# Altium PCB Quectel_SA800U-WF_PCB_Footprint_AD_V1.1.PcbDoc
Units mil, origin at the board's own origin, x right, y up, seen from the top; angles counter-clockwise.
Board outline 1456.69 x 2362.2 mil, 6 copper layers (TOP, lay2_SIGNAL, lay3_POWER, Inner Layer 4, Inner Layer 5, BOTTOM), stack 58.1 mil thick; 2 components, 0 nets, 344 pads, 0 vias.
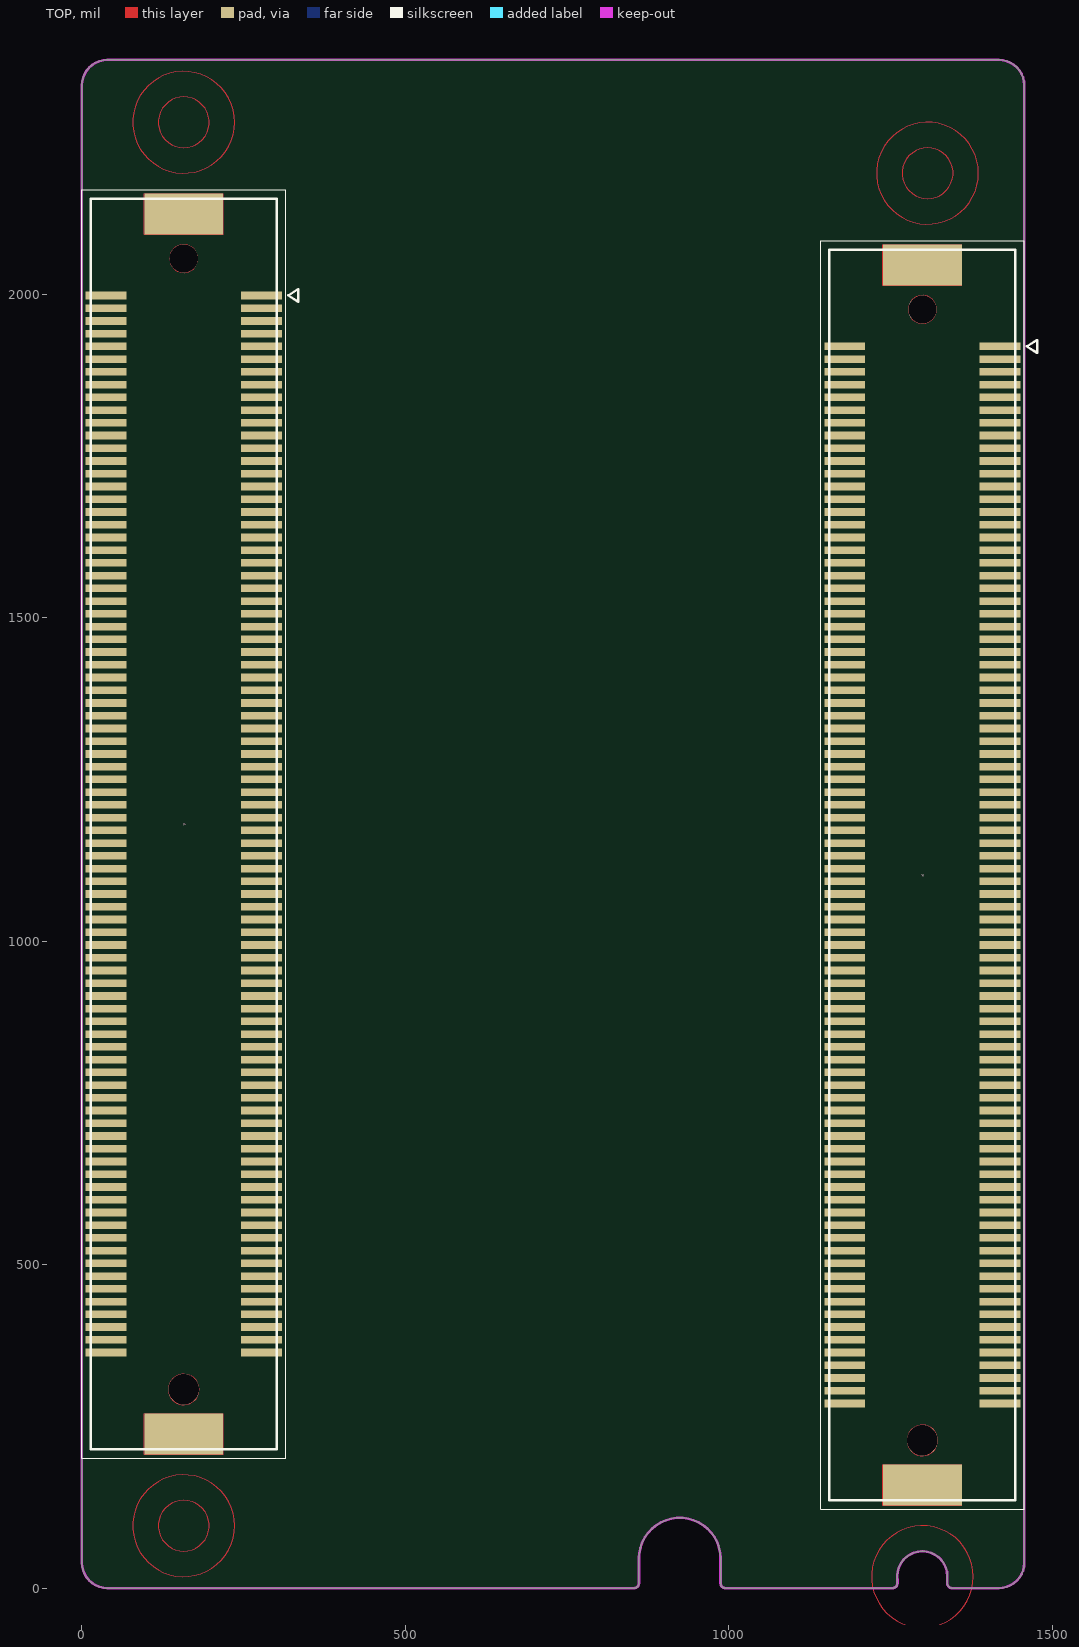
[diagram p0: TOP view]
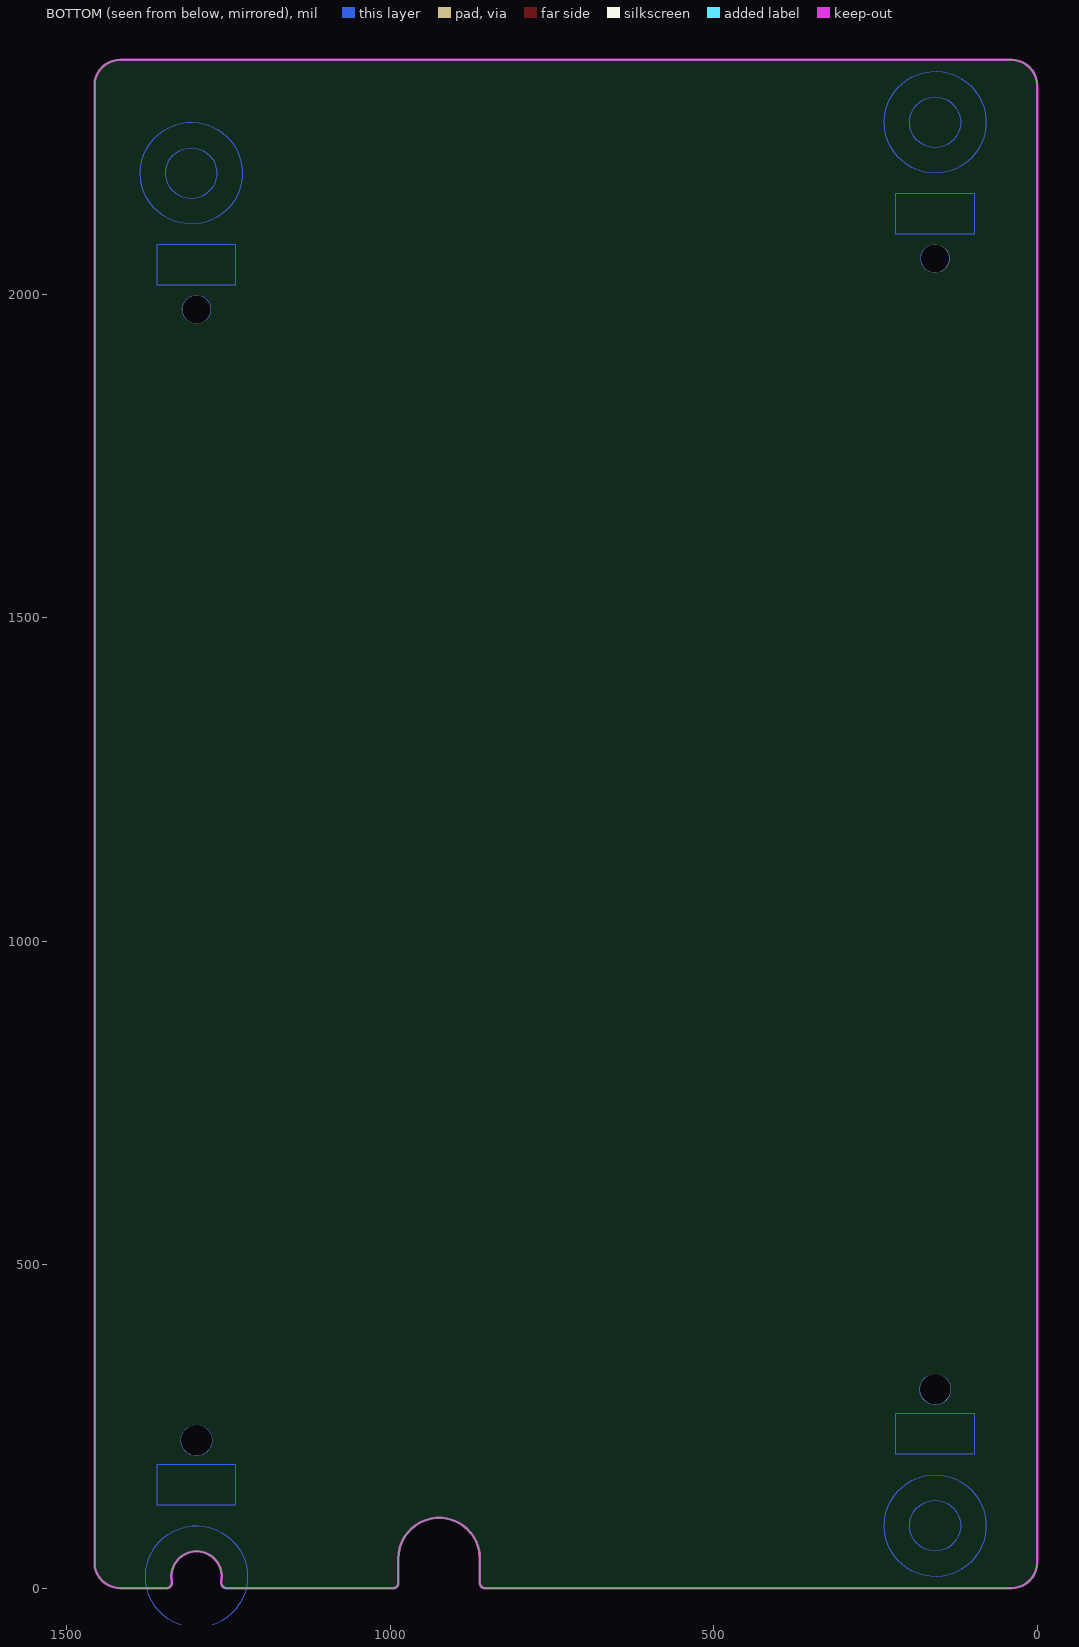
[diagram p1: BOTTOM view, seen from below]

## Layer stack, top to bottom
Solder Mask Top: solder mask 0.4, Solder Resist, Dk 3.5
TOP: signal copper 1.35
Dielectric1: dielectric 10, FR-4, Dk 4.3
lay2_SIGNAL: signal copper 1.35
Dielectric2: dielectric 10, FR-4, Dk 4.3
lay3_POWER: signal copper 1.35
Dielectric3: dielectric 10, FR-4, Dk 4.3
Inner Layer 4: signal copper 1.35
Dielectric4: dielectric 10, FR-4, Dk 4.3
Inner Layer 5: signal copper 1.35
Dielectric5: dielectric 10, FR-4, Dk 4.3
BOTTOM: signal copper 1.35
Solder Mask Bottom: solder mask 0.4, Solder Resist, Dk 3.5

## Board outline
0,39.37 ccw(c39.37,39.37) 39.37,0 853.27,0 853.26,0 ccw(c853.46,7.68) 861.14,7.87 861.14,45.78 861.14,45.79 cw(c924.13,45.68) 987.13,45.78 987.13,7.87 987.13,7.88 ccw(c994.8,7.68) 995,0 1252.81,0 ccw(c1252.81,7.87) 1260.69,7.87 1260.69,11.85 1260.69,11.84 cw(c1299.05,17.99) 1337.42,11.85 1337.42,7.87 ccw(c1345.29,7.87) 1345.29,0 1417.32,0 ccw(c1417.32,39.37) 1456.69,39.37 1456.69,2322.83 ccw(c1417.32,2322.83) 1417.32,2362.2 39.37,2362.2 ccw(c39.37,2322.83) 0,2322.83

## Design rules (kind name [scope] priority, off if disabled: settings)
Clearance [All] p1: gap=10 ignorepadtopadclearanceinfootprint=FALSE except(0: Arc-Hole Track-Hole SMDPad-Hole THPad-Hole Via-Hole Fill-Hole Poly-Hole Region-Hole Text-Hole)
PlaneConnect "Power Plane Connect Style - pads with no thermal" [(Name='J1-171') Or (Name='J1-172') Or (Name='J2-171') Or (Name='J2-172')] p1: planeconnectstyle=NoConnect reliefexpansion=20 reliefentries=4 reliefconductorwidth=10 reliefairgap=10 // PAD - No Thermal Connect Rule
PlaneConnect [All] p2: planeconnectstyle=Relief reliefexpansion=20 reliefentries=4 reliefconductorwidth=10 reliefairgap=10
PolygonConnect [All] p1: connectstyle=Relief reliefconductorwidth=10 reliefentries=4 polygonreliefangle="90 Angle" airgapwidth=10
RoutingVias [All] p1: holewidth=28 width=50 viastyle="Through Hole" minholewidth=28 minwidth=50 maxholewidth=28 maxwidth=50
SolderMaskExpansion [All] p1: expansion=4
Width [All] p1: maxlimit=10 minlimit=10 preferedwidth=10
29 further rules are at their usual default settings.

## Components (designator, comment, footprint, x,y, rotation, side; value= is the part's Value field where it differs from the comment)
J1 "FX10A-168S-SV_21" FX10A-168S-SV_21 157.48,1181.1 r270 top
J2 "FX10A-168S-SV_21" FX10A-168S-SV_21 1299.21,1102.36 r270 top

## Footprints (in the part's own frame and the unit in brackets; to place one, negate y for a bottom-side part, rotate by r counter-clockwise, add the part's x,y. Pads: shape width x height; smd on the part's side, far side on the other; paste and mask are expansions set on the pad)
FX10A-168S-SV_21 [mm]
  rect 0.3x1.6 smd mask+0.05: 1(-20.75,3.05) 2(-20.75,-3.05) 3(-20.25,3.05) 4(-20.25,-3.05) 5(-19.75,3.05) 6(-19.75,-3.05) 7(-19.25,3.05) 8(-19.25,-3.05) 9(-18.75,3.05) 10(-18.75,-3.05) 11(-18.25,3.05) 12(-18.25,-3.05) 13(-17.75,3.05) 14(-17.75,-3.05) 15(-17.25,3.05) 16(-17.25,-3.05) 17(-16.75,3.05) 18(-16.75,-3.05) 19(-16.25,3.05) 20(-16.25,-3.05) 21(-15.75,3.05) 22(-15.75,-3.05) 23(-15.25,3.05) 24(-15.25,-3.05) 25(-14.75,3.05) 26(-14.75,-3.05) 27(-14.25,3.05) 28(-14.25,-3.05) 29(-13.75,3.05) 30(-13.75,-3.05) 31(-13.25,3.05) 32(-13.25,-3.05) 33(-12.75,3.05) 34(-12.75,-3.05) 35(-12.25,3.05) 36(-12.25,-3.05) 37(-11.75,3.05) 38(-11.75,-3.05) 39(-11.25,3.05) 40(-11.25,-3.05) 41(-10.75,3.05) 42(-10.75,-3.05) 43(-10.25,3.05) 44(-10.25,-3.05) 45(-9.75,3.05) 46(-9.75,-3.05) 47(-9.25,3.05) 48(-9.25,-3.05) 49(-8.75,3.05) 50(-8.75,-3.05) 51(-8.25,3.05) 52(-8.25,-3.05) 53(-7.75,3.05) 54(-7.75,-3.05) 55(-7.25,3.05) 56(-7.25,-3.05) 57(-6.75,3.05) 58(-6.75,-3.05) 59(-6.25,3.05) 60(-6.25,-3.05) 61(-5.75,3.05) 62(-5.75,-3.05) 63(-5.25,3.05) 64(-5.25,-3.05) 65(-4.75,3.05) 66(-4.75,-3.05) 67(-4.25,3.05) 68(-4.25,-3.05) 69(-3.75,3.05) 70(-3.75,-3.05) 71(-3.25,3.05) 72(-3.25,-3.05) 73(-2.75,3.05) 74(-2.75,-3.05) 75(-2.25,3.05) 76(-2.25,-3.05) 77(-1.75,3.05) 78(-1.75,-3.05) 79(-1.25,3.05) 80(-1.25,-3.05) 81(-0.75,3.05) 82(-0.75,-3.05) 83(-0.25,3.05) 84(-0.25,-3.05) 85(0.25,3.05) 86(0.25,-3.05) 87(0.75,3.05) 88(0.75,-3.05) 89(1.25,3.05) 90(1.25,-3.05) 91(1.75,3.05) 92(1.75,-3.05) 93(2.25,3.05) 94(2.25,-3.05) 95(2.75,3.05) 96(2.75,-3.05) 97(3.25,3.05) 98(3.25,-3.05) 99(3.75,3.05) 100(3.75,-3.05) 101(4.25,3.05) 102(4.25,-3.05) 103(4.75,3.05) 104(4.75,-3.05) 105(5.25,3.05) 106(5.25,-3.05) 107(5.75,3.05) 108(5.75,-3.05) 109(6.25,3.05) 110(6.25,-3.05) 111(6.75,3.05) 112(6.75,-3.05) 113(7.25,3.05) 114(7.25,-3.05) 115(7.75,3.05) 116(7.75,-3.05) 117(8.25,3.05) 118(8.25,-3.05) 119(8.75,3.05) 120(8.75,-3.05) 121(9.25,3.05) 122(9.25,-3.05) 123(9.75,3.05) 124(9.75,-3.05) 125(10.25,3.05) 126(10.25,-3.05) 127(10.75,3.05) 128(10.75,-3.05) 129(11.25,3.05) 130(11.25,-3.05) 131(11.75,3.05) 132(11.75,-3.05) 133(12.25,3.05) 134(12.25,-3.05) 135(12.75,3.05) 136(12.75,-3.05) 137(13.25,3.05) 138(13.25,-3.05) 139(13.75,3.05) 140(13.75,-3.05) 141(14.25,3.05) 142(14.25,-3.05) 143(14.75,3.05) 144(14.75,-3.05) 145(15.25,3.05) 146(15.25,-3.05) 147(15.75,3.05) 148(15.75,-3.05) 149(16.25,3.05) 150(16.25,-3.05) 151(16.75,3.05) 152(16.75,-3.05) 153(17.25,3.05) 154(17.25,-3.05) 155(17.75,3.05) 156(17.75,-3.05) 157(18.25,3.05) 158(18.25,-3.05) 159(18.75,3.05) 160(18.75,-3.05) 161(19.25,3.05) 162(19.25,-3.05) 163(19.75,3.05) 164(19.75,-3.05) 165(20.25,3.05) 166(20.25,-3.05) 167(20.75,3.05) 168(20.75,-3.05)
  rect 1.6x3.1 smd mask+0.05: 169(-23.95,0) 170(23.95,0)
  round 1.1 hole 1.1 unplated mask+0.05: 171(-22.2,0)
  round 1.2 hole 1.2 unplated mask+0.05: 172(22.2,0)
  silkscreen extent -24.9,-4 24.9,4.5

## Nets (pads, with @x,y where several pads share a name; then routed paths per layer and width w, separated by ;. In a path a pad name is that pad's centre, name@x,y a point inside that pad or via, vN(x,y) a via of type N, cw(c..) or ccw(c..) an arc to the next point about the centre after c; other vN are vias at no path point)
pads on no net: J1.1 J1.2 J1.3 J1.4 J1.5 J1.6 J1.7 J1.8 J1.9 J1.10 J1.11 J1.12 J1.13 J1.14 J1.15 J1.16 J1.17 J1.18 J1.19 J1.20 J1.21 J1.22 J1.23 J1.24 J1.25 J1.26 J1.27 J1.28 J1.29 J1.30 J1.31 J1.32 J1.33 J1.34 J1.35 J1.36 J1.37 J1.38 J1.39 J1.40 J1.41 J1.42 J1.43 J1.44 J1.45 J1.46 J1.47 J1.48 J1.49 J1.50 J1.51 J1.52 J1.53 J1.54 J1.55 J1.56 J1.57 J1.58 J1.59 J1.60 J1.61 J1.62 J1.63 J1.64 J1.65 J1.66 J1.67 J1.68 J1.69 J1.70 J1.71 J1.72 J1.73 J1.74 J1.75 J1.76 J1.77 J1.78 J1.79 J1.80 J1.81 J1.82 J1.83 J1.84 J1.85 J1.86 J1.87 J1.88 J1.89 J1.90 J1.91 J1.92 J1.93 J1.94 J1.95 J1.96 J1.97 J1.98 J1.99 J1.100 J1.101 J1.102 J1.103 J1.104 J1.105 J1.106 J1.107 J1.108 J1.109 J1.110 J1.111 J1.112 J1.113 J1.114 J1.115 J1.116 J1.117 J1.118 J1.119 J1.120 J1.121 J1.122 J1.123 J1.124 J1.125 J1.126 J1.127 J1.128 J1.129 J1.130 J1.131 J1.132 J1.133 J1.134 J1.135 J1.136 J1.137 J1.138 J1.139 J1.140 J1.141 J1.142 J1.143 J1.144 J1.145 J1.146 J1.147 J1.148 J1.149 J1.150 J1.151 J1.152 J1.153 J1.154 J1.155 J1.156 J1.157 J1.158 J1.159 J1.160 J1.161 J1.162 J1.163 J1.164 J1.165 J1.166 J1.167 J1.168 J1.169 J1.170 J1.171 J1.172 J2.1 J2.2 J2.3 J2.4 J2.5 J2.6 J2.7 J2.8 J2.9 J2.10 J2.11 J2.12 J2.13 J2.14 J2.15 J2.16 J2.17 J2.18 J2.19 J2.20 J2.21 J2.22 J2.23 J2.24 J2.25 J2.26 J2.27 J2.28 J2.29 J2.30 J2.31 J2.32 J2.33 J2.34 J2.35 J2.36 J2.37 J2.38 J2.39 J2.40 J2.41 J2.42 J2.43 J2.44 J2.45 J2.46 J2.47 J2.48 J2.49 J2.50 J2.51 J2.52 J2.53 J2.54 J2.55 J2.56 J2.57 J2.58 J2.59 J2.60 J2.61 J2.62 J2.63 J2.64 J2.65 J2.66 J2.67 J2.68 J2.69 J2.70 J2.71 J2.72 J2.73 J2.74 J2.75 J2.76 J2.77 J2.78 J2.79 J2.80 J2.81 J2.82 J2.83 J2.84 J2.85 J2.86 J2.87 J2.88 J2.89 J2.90 J2.91 J2.92 J2.93 J2.94 J2.95 J2.96 J2.97 J2.98 J2.99 J2.100 J2.101 J2.102 J2.103 J2.104 J2.105 J2.106 J2.107 J2.108 J2.109 J2.110 J2.111 J2.112 J2.113 J2.114 J2.115 J2.116 J2.117 J2.118 J2.119 J2.120 J2.121 J2.122 J2.123 J2.124 J2.125 J2.126 J2.127 J2.128 J2.129 J2.130 J2.131 J2.132 J2.133 J2.134 J2.135 J2.136 J2.137 J2.138 J2.139 J2.140 J2.141 J2.142 J2.143 J2.144 J2.145 J2.146 J2.147 J2.148 J2.149 J2.150 J2.151 J2.152 J2.153 J2.154 J2.155 J2.156 J2.157 J2.158 J2.159 J2.160 J2.161 J2.162 J2.163 J2.164 J2.165 J2.166 J2.167 J2.168 J2.169 J2.170 J2.171 J2.172

## Keep-outs
Keep-Out Layer:
  the board outline again, w3.94

## Other copper
Multi-Layer:
  circle w1: c157.48,2265.75 r78.74
  circle w1: c1299.21,228.35 r23.62
  circle w1: c157.48,307.09 r23.62
  circle w1: c157.48,2055.12 r21.65
  circle w1: c1299.21,17.72 r78.74
  circle w1: c157.48,96.46 r78.74
  circle w1: c1307.13,2187.01 r78.74
  circle w1: c1299.21,1976.38 r21.65
  lines w1: 0,39.36 ccw(c39.5,39.5) 39.5,0 853.28,0 ccw(c853.27,7.87) 861.14,7.87 861.14,45.77 cw(c924.13,45.77) 987.13,45.77 987.13,7.87 ccw(c994.8,7.68) 994.8,0 1253,0 ccw(c1250.98,9.51) 1260.7,9.51 ; 0,39.37 0,2322.83 cw(c39.37,2322.83) 39.51,2362.2 1417.19,2362.2 cw(c1417.19,2322.7) 1456.69,2322.84 1456.69,1181.1 1456.69,39.5 cw(c1417.19,39.5) 1417.33,0 1345.42,0 ; 1260.7,9.53 cw(c1299.21,17.71) 1337.72,9.53 ; 1345.42,0 cw(c1345.42,7.87) 1337.72,9.51 ccw(c1345.42,7.87) 1345.42,0 ; 96.46,206.69 96.46,269.69 218.5,269.69 218.5,206.69 96.46,206.69 ; 96.46,2092.52 218.5,2092.52 218.5,2155.51 96.46,2155.51 96.46,2092.52 ; 157.48,57.09 ccw(c157.48,96.46) 157.48,135.83 ccw(c157.48,96.46) 157.48,57.09 ; 157.48,2226.38 ccw(c157.48,2265.75) 157.48,2305.12 ccw(c157.48,2265.75) 157.48,2226.38 ; 1238.19,127.95 1360.24,127.95 1360.24,190.94 1238.19,190.94 1238.19,127.95 ; 1238.19,2013.78 1360.24,2013.78 1360.24,2076.77 1238.19,2076.77 1238.19,2013.78 ; 1307.32,2147.64 cw(c1307.32,2187.01) 1307.32,2226.38 cw(c1307.32,2187.01) 1307.32,2147.64